# EAGLE board LPC1114 -- Valdez Mutant v.01 (EAGLE 7.0.0)
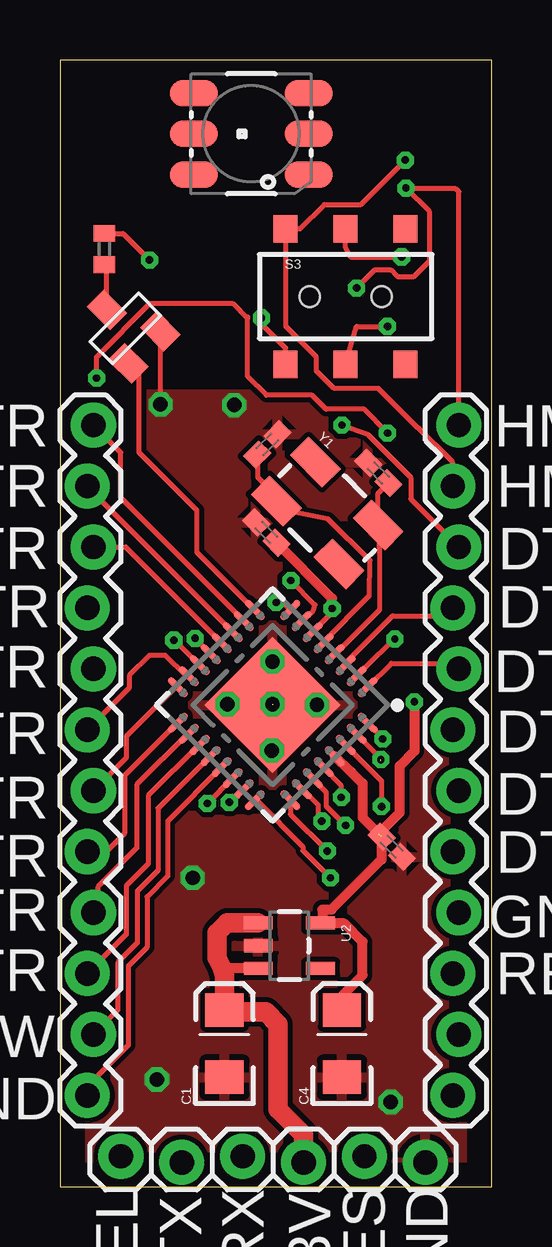
[diagram p0: board, top side]
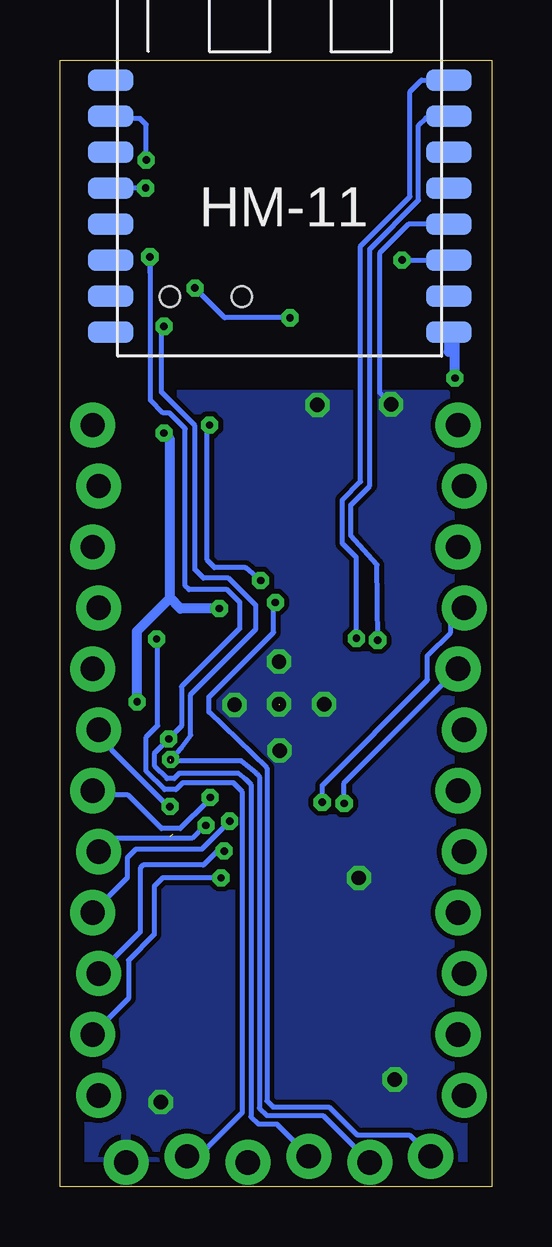
[diagram p1: board, bottom side, seen from below]

Size 18 x 46.97 mm. Coordinates in mm from the lower left corner, seen from the top.
Outline: 0,0 18,0 18,46.97 0,46.97 0,0
Copper layers (1*16): Top 0.035mm / dielectric 1.5mm / Bottom 0.035mm
Design rules "default": minimum track width 10mil, minimum drill 24mil, track to track 8mil, track to pad 8mil, pad to pad 8mil, via to via 8mil, smd to smd 8mil, copper to edge 40mil, drill to drill 8mil, minimum pad ring 10mil, minimum via ring 8mil, stop-mask expansion 4mil, vias tented up to drill 0mil, thermal gap 10mil

## Footprints (pad centres in the part's own frame; a part is rotated, then mirrored left to right if it is on the bottom)
EIA3216 = smd 1.4 x 1.6: A 1.4,0; C -1.4,0
C0402K = smd 0.925 x 0.74: 1 -0.6,0; 2 0.6,0
1X12_LOCK = drill 1.016 pad 1.88: 1 0,0.127; 2 2.54,-0.127; 3 5.08,0.127; 4 7.62,-0.127; 5 10.16,0.127; 6 12.7,-0.127; 7 15.24,0.127; 8 17.78,-0.127; 9 20.32,0.127; 10 22.86,-0.127; 11 25.4,0.127; 12 27.94,-0.127
1X06_LOCK = drill 1.016 pad 1.88: 1 0,0; 2 2.54,-0.254; 3 5.08,0; 4 7.62,-0.254; 5 10.16,0; 6 12.7,-0.254
LED-TRICOLOR-5050 = smd 2 x 1.1: 1 -2.4,1.7; 2 -2.4,0; 3 -2.4,-1.7; 4 2.4,-1.7; 5 2.4,0; 6 2.4,1.7
SOT23 = smd 1 x 1.4: 1 -0.95,-1.1; 2 0.95,-1.1; 3 0,1.1
R0402 = smd 0.7 x 0.9: 1 -0.65,0; 2 0.65,0
AYZ0202 = smd 1 x 1.15: 1 -2.5,2.825; 2 0,2.825; 3 2.5,2.825; 4 -2.5,-2.825; 5 0,-2.825; 6 2.5,-2.825 | hole 0.85: 1.5,0; -1.5,0
HVQFN33-7X7 = smd 1.067 x 0.3: P$1 -3.327,2.275; P$2 -3.327,1.625; P$3 -3.327,0.975; P$4 -3.327,0.325; P$5 -3.327,-0.325; P$6 -3.327,-0.975; P$7 -3.327,-1.625; P$8 -3.327,-2.275; P$17 3.327,-2.275; P$18 3.327,-1.625; P$19 3.327,-0.975; P$20 3.327,-0.325; P$21 3.327,0.325; P$22 3.327,0.975; P$23 3.327,1.625; P$24 3.327,2.275 | smd 0.3 x 1.067: P$9 -2.275,-3.327; P$10 -1.625,-3.327; P$11 -0.975,-3.327; P$12 -0.325,-3.327; P$13 0.325,-3.327; P$14 0.975,-3.327; P$15 1.625,-3.327; P$16 2.275,-3.327; P$25 2.275,3.327; P$26 1.625,3.327; P$27 0.975,3.327; P$28 0.325,3.327; P$29 -0.325,3.327; P$30 -0.975,3.327; P$31 -1.625,3.327; P$32 -2.275,3.327 | smd 4 x 4: P$33 0,0
SOT23-5 = smd 0.55 x 1.2: 1 -0.95,-1.3; 2 0,-1.3; 3 0.95,-1.3; 4 0.95,1.3; 5 -0.95,1.3
HM-11 = smd 1.9 x 0.9: 1 -0.3,11.5; 2 -0.3,10; 3 -0.3,8.5; 4 -0.3,7; 5 -0.3,5.5; 6 -0.3,4; 7 -0.3,2.5; 8 -0.3,1; 9 13.8,1; 10 13.8,2.5; 11 13.8,4; 12 13.8,5.5; 13 13.8,7; 14 13.8,8.5; 15 13.8,10; 16 13.8,11.5
CRYSTAL-SMD-5X3 = smd 1.9 x 1.1: 1 -1.85,-1.15; 2 1.85,-1.15; 3 1.85,1.15; 4 -1.85,1.15

## Placement (x,y rotation side)
C1  10uF  [EIA3216]  6.86,5.97 90 top
C2  6PF  [C0402K]  8.65,30.94 225 top
C3  6PF  [C0402K]  13.28,29.75 315 top
C4  10uF  [EIA3216]  11.76,5.97 90 top
C5  6PF  [C0402K]  13.84,14.18 315 top
C6  6PF  [C0402K]  8.61,27.27 135 top
JP1  M12LOCK  [1X12_LOCK]  1.27,3.81 90 top
JP2  M12LOCK  [1X12_LOCK]  16.51,3.81 90 top
JP3  [1X06_LOCK]  2.54,1.27 0 top
LED1  LED-TRICOLOR-5050NO_IC  [LED-TRICOLOR-5050]  7.98,43.89 180 top
Q1  BSS138  [SOT23]  2.73,35.78 45 top
R2  1k  [R0402]  1.85,39.09 270 top
S3  DPDT  [AYZ0202]  11.91,37.11 0 top
U1  [HVQFN33-7X7]  8.87,20.08 225 top
U2  V_REG_LDOSMD  [SOT23-5]  9.57,10.05 270 top
U$1  HM-11  [HM-11]  15.59,34.62 0 bottom
Y1  12.5mhz  [CRYSTAL-SMD-5X3]  11.15,28.09 315 top

## Library data of the parts
C1 C4 = SparkFun-Capacitors
C2 C3 C5 C6 R2 = resistor
JP1-JP3 = SparkFun-Connectors
LED1 = SparkFun-LED
Q1 = SparkFun-DiscreteSemi; PROD_ID: TRANS-00830
S3 = SparkFun-Electromechanical; PROD_ID: SWCH-08179
U1 = microbuilder; DIGIKEY#: 568-4948-ND; MANF: NXP; MANF#: LPC1114FHN33/301,5
U2 = SparkFun-PowerIC
U$1 = HM-11
Y1 = SparkFun-FreqCtrl

## Nets
3.3V: C4.A C5.1 C6.1 U1.P$6 U1.P$29 U2.5 U$1.9
5V: C1.A JP3.4 U2.1 U2.3
GND: C1.C C2.1 C3.1 C4.C C5.2 C6.2 JP3.6 Q1.2 U1.P$33 U2.2 U$1.12
HM-RX: JP2.12 S3.4 U$1.4
HM-TX: JP2.11 S3.1 U$1.2
HM_CONN: U1.P$13 U$1.16
HM_KEY: U1.P$14 U$1.15
IO20: JP2.8 U1.P$1
IO_00_RES: JP3.5 U1.P$2
IO_01: JP2.9 U1.P$3
IO_02_SEL: JP3.1 U1.P$8
IO_03: Q1.1 U1.P$9
IO_05-SDA: JP1.11 U1.P$11
IO_06: JP1.7 U1.P$15
IO_07: JP1.6 U1.P$16
IO_08: JP1.5 U1.P$17
IO_08-SCL: JP1.12 U1.P$10
IO_09: JP1.4 U1.P$18
IO_10: JP1.8 U1.P$22
IO_010: JP1.3 U1.P$19
IO_11: JP1.9 U1.P$23
IO_011: JP1.1 U1.P$21
IO_12: JP2.2 U1.P$24
IO_13: JP2.3 U1.P$25
IO_14: JP2.4 U1.P$26
IO_15: JP2.7 U1.P$30
IO_18: JP2.10 U1.P$7
IO_19: JP1.10 U1.P$12
IO_32: JP2.6 U1.P$28
IO_110: JP1.2 U1.P$20
IO_111: JP2.5 U1.P$27
N$5: JP2.1
N$8: Q1.3 R2.2
N$9: R2.1 U$1.11
N$31: C3.2 U1.P$4 Y1.3
N$32: C2.2 U1.P$5 Y1.1
RX: JP3.3 S3.2 U1.P$32
TX: JP3.2 S3.5 U1.P$31

## Tracks (layer width: path | path; a pad name or v marks a point on that pad's centre or on a via)
3.3V  (via drill 0.3 pad 0.25)  (1 unrouted)
  Top 0.203: U2.5 | 13.66,31.45 12.7,32.41 11.1,32.41 10.52,32.99 8.61,32.99 7.82,33.78 7.82,36.2 | 7.82,36.2 7.82,36.27 | 11.35,23.94 U1.P$6 | v1.52,33.71 1.52,34.59 3.76,36.83 7.19,36.83 7.82,36.2
  Top 0.406: U1.P$29 12.14,17.3 12.62,16.82 12.62,15.39 C5.1 13.41,13.64 11.33,11.56 10.95,11.56 10.95,11.08 U2.5 10.9,10.97 11.86,10.97 12.62,10.21 12.62,8.81 11.79,7.98 C4.A | v13.66,31.42 13.66,31.45 | v14.78,20.22 14.78,18.16 14.17,17.55 14.17,15.6 13.28,14.71 | 11.35,23.94 v11.35,24.11 11.35,24.53 C6.1
  Bottom 0.406: 1.79,34.81 U$1.9 1.52,35.36 v1.52,33.71 | v14.78,20.22 14.78,23.16 13.41,24.54 | 13.41,24.54 13.41,31.17 v13.66,31.42 | 11.23,23.98 v11.35,24.11 12.98,24.11 13.41,24.54
5V
  Top 0.203: U2.3
  Top 0.406: 6.76,9.12 7.86,9.12 U2.3
  Top 0.813: JP3.4 10.16,2.16 9.09,3.23 9.09,6.78 8.59,7.29 6.94,7.29 C1.A 6.86,8.79 6.76,9.12 6.55,9.55 6.55,10.59 6.96,11 U2.1
GND  (via drill 0.6 pad 0.81)  (1 unrouted)
  Top 0.203: Q1.2 4.18,32.62 v4.19,32.61
  Bottom 0.203: U$1.12 3.47,40.12 4.67,38.91 4.67,33.1 v4.19,32.61
  other vias: 8.86,20.12 8.86,21.89 10.72,20.09 8.84,18.19 6.99,20.12 4.04,4.47 13.79,3.53 5.54,12.88 7.26,32.59
  pour Bottom: 0,33.02 0,0 17.78,0 17.78,33.02
  pour Top: 0,33.02 0,0 17.78,0 17.78,33.02
HM-RX  (via drill 0.3 pad 0.25)
  Top 0.203: S3.4 9.41,34.96 8.46,35.92 8.46,36.17 v8.41,36.22 | v12.37,37.47 13.13,38.23 13.79,38.23 14.07,37.95 14.76,37.95 15.42,38.61 15.42,40.64 v14.43,41.63 14.45,41.6 16.51,41.6 16.64,41.48 JP2.12
  Bottom 0.203: v14.43,41.63 15.88,41.63 U$1.4 | v8.41,36.22 11.12,36.22 v12.37,37.47
HM-TX  (via drill 0.3 pad 0.25)
  Top 0.203: JP2.11 16.38,30.2 14.94,31.65 14.91,31.65 13.28,33.27 11.43,33.27 10.69,34.01 10.69,34.59 9.42,35.87 9.42,39.92 S3.1 10.01,39.93 11.02,40.95 12.55,40.95 v14.4,42.8
  Bottom 0.203: v14.4,42.8 14.4,44.27 14.66,44.53 15.79,44.53 U$1.2
HM_CONN  (via drill 0.3 pad 0.25)
  Top 0.203: U1.P$13 6.22,22.2 6.22,22.28 v5.64,22.86
  Bottom 0.203: v5.64,22.86 5.64,26.24 6.22,26.82 6.22,28.63 5.46,29.39 5.46,39.22 3.4,41.27 3.4,45.64 2.92,46.13 U$1.16
HM_KEY  (via drill 0.3 pad 0.25)
  Top 0.203: U1.P$14 5.83,21.76 v4.75,22.78
  Bottom 0.203: v4.75,22.78 4.78,25.93 5.87,27.15 5.87,28.42 5.08,29.21 5.08,39.09 3.05,41.12 3.05,44.25 2.74,44.55 1.86,44.55 U$1.15
IO20
  Top 0.203: U1.P$1 13.82,21.82 16.41,21.82 JP2.8
IO_00_RES  (via drill 0.3 pad 0.25)
  Top 0.203: 12.37,21.31 U1.P$2 13.11,22.02 v13.97,22.84
  Bottom 0.203: v13.97,22.84 13.92,22.78 13.92,19.23 14.4,18.75 14.4,17.32 13.64,16.56 13.16,16.56 12.88,16.84 10.77,16.84 10.39,16.46 10.39,3.1 12.22,1.27 JP3.5
IO_01
  Top 0.203: U1.P$3 11.91,21.84 13.87,23.8 16.05,23.8 JP2.9
IO_02_SEL  (via drill 0.3 pad 0.25)
  Top 0.203: v9.02,24.36 9.3,24.36 U1.P$8
  Bottom 0.203: v9.02,24.36 9.09,24.28 9.09,23.11 11.79,20.42 11.79,19.79 9.37,17.45 9.37,3.58 9.12,3.33 6.78,3.33 5.61,2.16 3.43,2.16 JP3.1
IO_03
  Top 0.203: U1.P$9 8.11,24.04 5.71,26.44 5.71,28.19 3.3,30.61 3.3,33.87 Q1.1
IO_05-SDA
  Top 0.203: JP1.11 1.14,29.19 U1.P$11
IO_06
  Top 0.203: U1.P$15 5.26,21.29 4.39,22.15 3.73,22.15 2.9,21.31 2.9,20.8 JP1.7
IO_07
  Top 0.203: U1.P$16 4.82,20.82 2.77,18.77 2.77,17.88 JP1.6
IO_08
  Top 0.203: U1.P$17 4.88,19.34 2.69,17.14 2.69,14.73 1.85,13.89 1.22,13.89 JP1.5
IO_08-SCL
  Top 0.203: U1.P$10 7.67,23.6 2.54,28.73 2.54,30.61 JP1.12
IO_09
  Top 0.203: U1.P$18 5.31,18.88 3.2,16.76 3.2,14.12 1.57,12.5 1.57,11.61 JP1.4
IO_10  (via drill 0.3 pad 0.25)
  Top 0.203: U1.P$22 v6.15,15.98
  Bottom 0.203: v6.15,15.98 6.15,16.84 JP1.8
IO_010
  Top 0.203: U1.P$19 5.79,18.42 3.68,16.31 3.68,13.46 2.77,12.55 2.77,10.52 JP1.3
IO_11  (via drill 0.3 pad 0.25)
  Top 0.203: U1.P$23 7.61,16.58 v7.06,16.03
  Bottom 0.203: v7.06,16.03 7.06,16.74 2.67,21.13 2.67,22.15 1.7,23.11 1.7,23.57 JP1.9
IO_011
  Top 0.203: U1.P$21 4.5,15.24 4.5,12.95 3.63,12.09 3.63,9.98 2.85,9.2 2.85,5.89 1.57,4.62 1.57,4.24 JP1.1
IO_12  (via drill 0.3 pad 0.25)
  Top 0.203: U1.P$24 8.19,16.12 10.13,14.17 10.13,14.02 v11.28,12.88
  Bottom 0.203: v11.28,12.88 13.72,12.88 14.07,12.52 14.07,10.52 15.14,9.45 15.14,7.85 JP2.2
IO_13  (via drill 0.3 pad 0.25)
  Top 0.203: U1.P$25 9.61,15.53 v11.15,13.99
  Bottom 0.203: v11.15,13.99 11.43,13.99 12.01,13.41 14.53,13.41 14.66,13.28 14.66,10.62 JP2.3
IO_14  (via drill 0.3 pad 0.25)
  Top 0.203: U1.P$26 10.12,16.58 10.77,15.93 10.77,15.44 v10.92,15.24
  Bottom 0.203: v10.92,15.24 12.09,14.07 14.83,14.07 15.19,13.72 15.19,12.88 JP2.4
IO_15  (via drill 0.3 pad 0.25)
  Top 0.203: U1.P$30 13.41,16.92 v13.41,15.85
  Bottom 0.203: v13.41,15.85 13.49,15.85 15.85,18.21 15.85,18.52 JP2.7
IO_18  (via drill 0.3 pad 0.25)
  Top 0.203: U1.P$7 10.05,23.54 10.57,24.03 10.64,24.26 v9.63,25.27 | v11.76,31.75 12.83,31.37 14.63,29.57 14.63,28.68 JP2.10
  Bottom 0.203: v9.63,25.27 10.26,25.81 11.56,25.81 11.86,26.14 11.86,31.65 v11.76,31.75
IO_19
  Top 0.203: JP1.10 2.74,26.67 U1.P$12
IO_32  (via drill 0.3 pad 0.25)
  Top 0.203: U1.P$28 10.99,17.48 11.71,16.74 11.71,16.36 v11.73,16.23
  Bottom 0.203: v11.73,16.23 11.86,16.05 12.98,14.94 13.77,14.94 15.16,16.33 16.46,16.33 JP2.6
IO_110
  Top 0.203: U1.P$20 6.28,17.96 4.09,15.77 4.09,13.18 3.23,12.32 3.23,10.16 2.41,9.35 2.41,7.37 JP1.2
IO_111  (via drill 0.3 pad 0.25)
  Top 0.203: U1.P$27 10.53,17.03 11.1,16.46 11.1,15.88 v11.91,15.06
  Bottom 0.203: v11.91,15.06 11.96,15.06 12.5,14.53 15.82,14.53 JP2.5
N$8
  Top 0.203: Q1.3 1.96,38.34 R2.2
N$9  (via drill 0.3 pad 0.25)
  Top 0.203: R2.1 2.63,39.74 v3.73,38.63
  Bottom 0.203: v3.73,38.63 1.8,38.63 U$1.11
N$31
  Top 0.203: U1.P$4 11.48,22.2 13.34,24.05 13.34,26.48 Y1.3 13.27,28.9 C3.2
N$32
  Top 0.203: U1.P$5 10.99,22.7 12.9,24.64 12.93,26.11 11.18,27.84 9.41,28.19 Y1.1 9.03,28.79 8.26,29.57 8.26,30.49 C2.2
RX  (via drill 0.3 pad 0.25)
  Top 0.203: U1.P$32 12.87,19.34 v13.46,18.67 | v14.25,38.76 12.12,38.76 11.91,39.14 S3.2
  Bottom 0.203: 14.25,38.12 v14.25,38.76 14.22,38.1 14.22,32.79 13.69,32.26 13.44,32.26 12.78,31.6 12.78,25.04 12.62,24.89 11.02,24.89 10.49,24.36 10.49,23.29 12.93,20.85 12.93,19.2 v13.46,18.67 14.05,18.09 14.05,17.53 13.54,17.02 13.23,17.02 13.01,17.25 10.57,17.25 10.26,16.99 10.03,16.76 10.03,2.92 9.73,2.62 8.97,2.62 JP3.3
TX  (via drill 0.3 pad 0.25)  (1 unrouted)
  Top 0.203: U1.P$31 v13.39,17.8 | S3.5 12.37,35.87 v13.66,35.87
  Bottom 0.203: 13.39,17.75 10.44,17.75 9.8,17.22 9.68,17.09 9.68,3.28 9.37,2.97 7.04,2.97 JP3.2 | v13.39,17.8 12.93,18.31 12.55,18.82 12.55,20.52 9.83,23.24 9.83,24.23 10.97,25.38 12.01,25.38 12.37,25.73 12.37,31.73 13.77,33.12 13.77,35.76 v13.66,35.87
(copper drawn outside any net)
  shapes: Top circle x1

## Text on the board
Top: US Quarter
tNames: DTR | HM-RX | DTR | HM-TX | DTR | DTR | DTR | DTR | DTR | DTR | DTR | DTR | DTR | DTR | DTR | DTR | DTR | GND | DTR | RESET | RAW | GND | TX | RX | 3.3V | GND | DTR/SEL | CTS/RES